# Altium PCB 1_Interface_Charge_RBF.PcbDoc
Units mm, origin at the board's own origin, x right, y up, seen from the top; angles counter-clockwise.
Board outline 82.5 x 28 mm, 2 copper layers (Top Layer, Bottom Layer), stack 1.57 mm thick; 17 components, 12 nets, 72 pads, 8 vias.
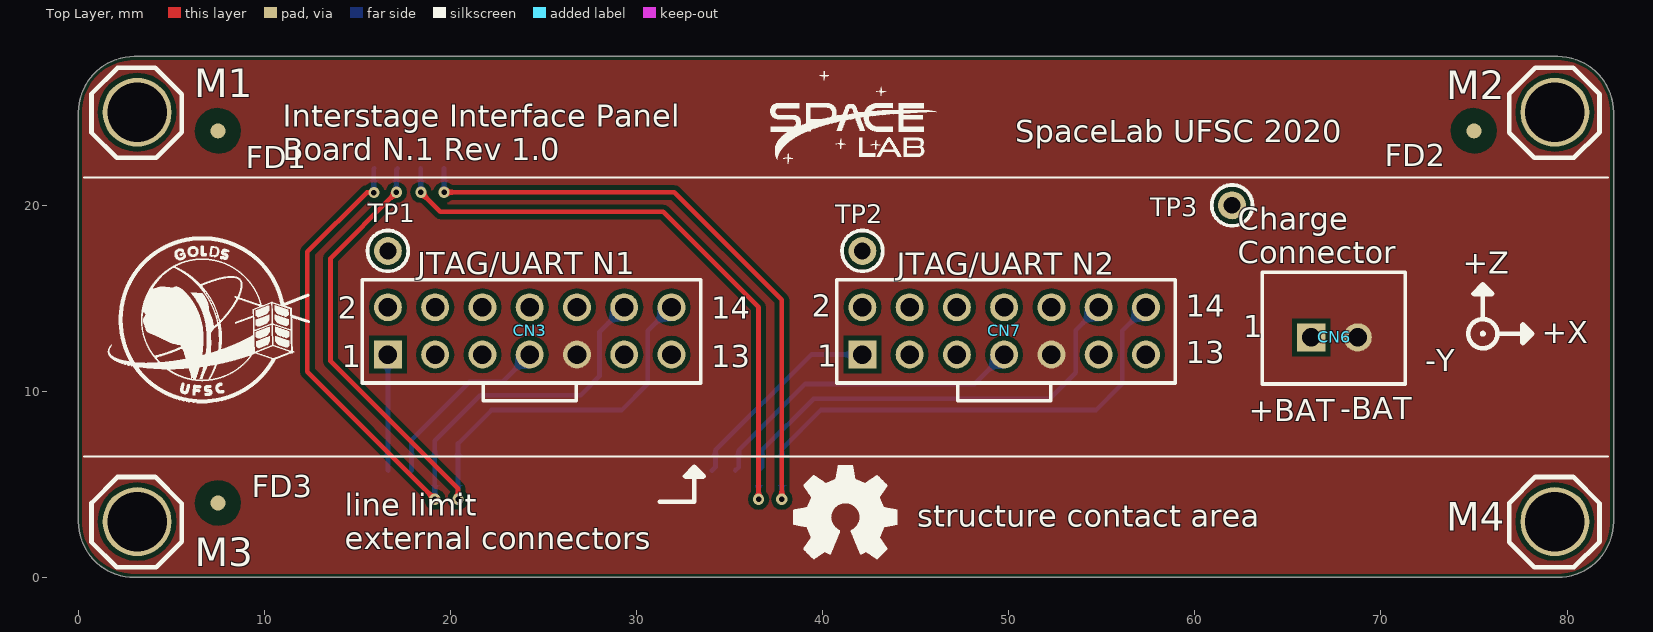
[diagram p0: Top Layer view]
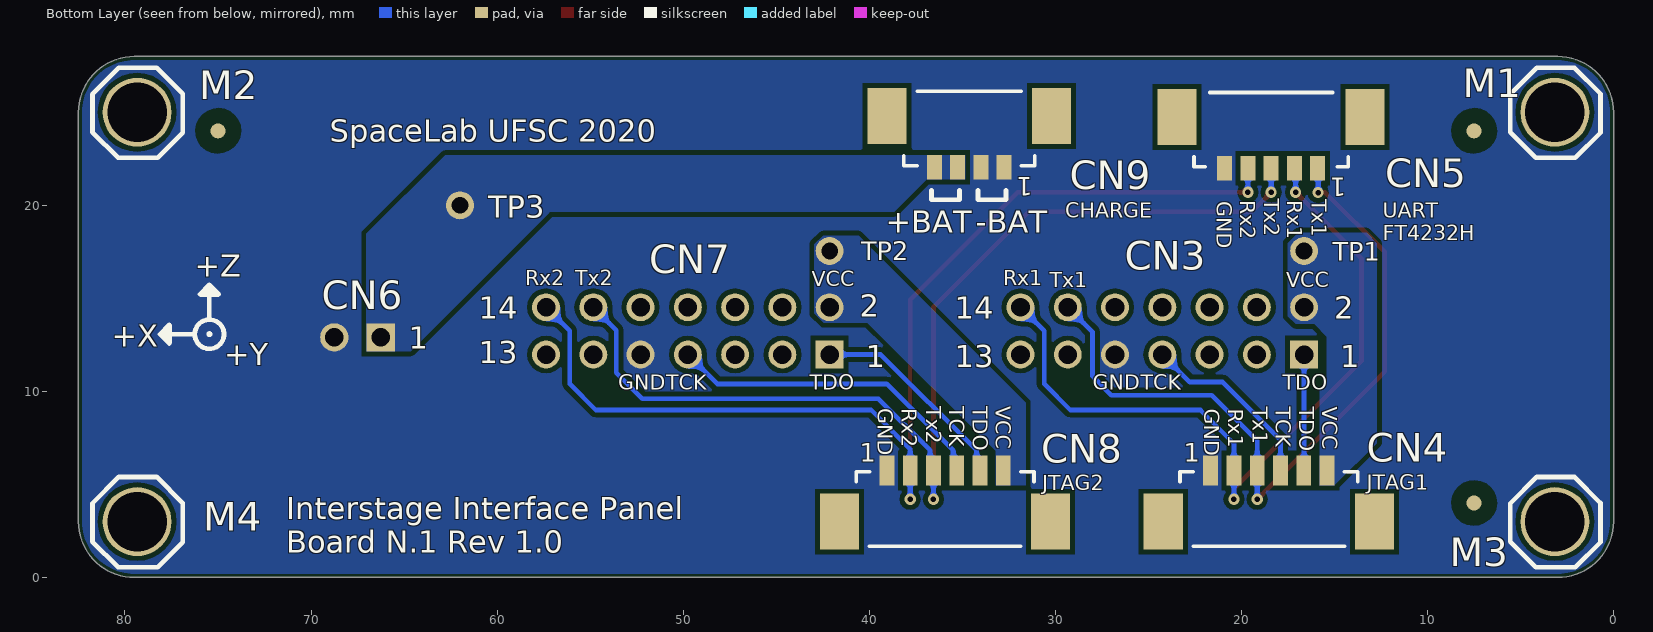
[diagram p1: Bottom Layer view, seen from below]
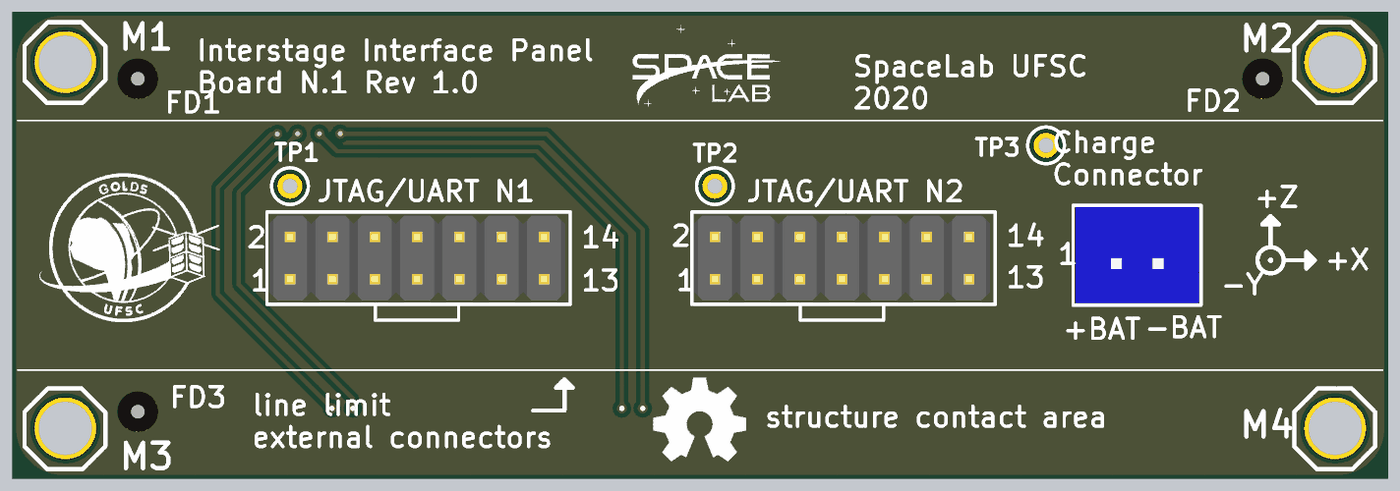
[diagram p2: 3D render of the assembled board from above, using the file's embedded part models]
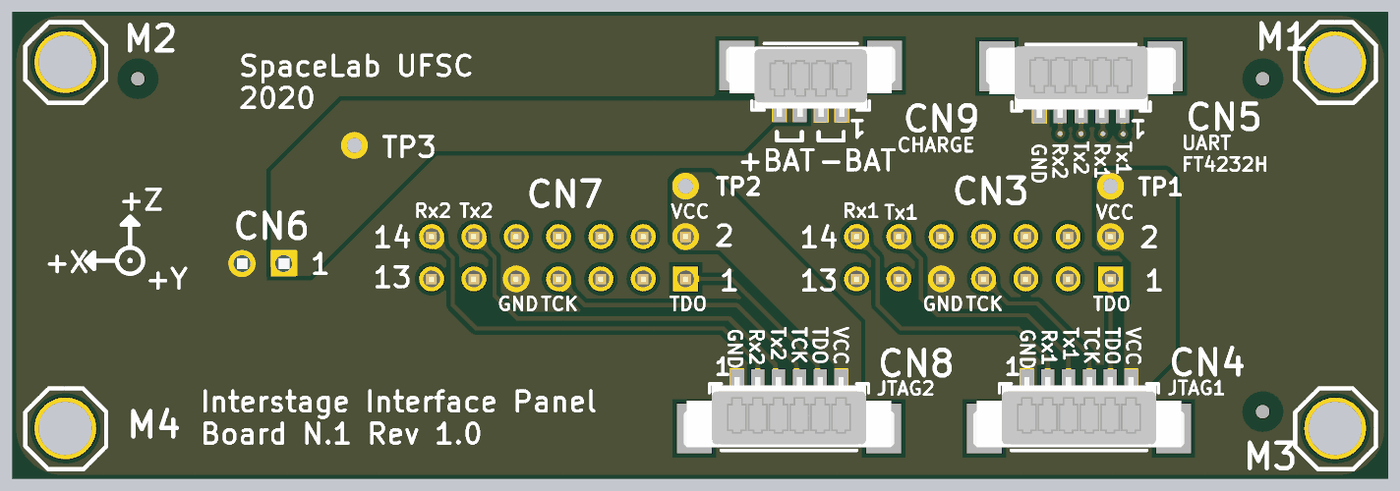
[diagram p3: 3D render of the assembled board from below, using the file's embedded part models]

## Layer stack, top to bottom
Top Solder: solder mask 0.0102, Solder Resist, Dk 3.5
Top Layer: signal copper 0.035
Dielectric 1: dielectric 1.5, FR-4, Dk 4.2
Bottom Layer: signal copper 0.035
Bottom Solder: solder mask 0.0102, Solder Resist, Dk 3.5

## Board outline
79.5,0 ccw(c79.5,3) 82.5,3 82.5,25 ccw(c79.5,25) 79.5,28 3,28 ccw(c3,25) 0,25 0,3 ccw(c3,3) 3,0

## Design rules (kind name [scope] priority, off if disabled: settings)
BoardOutlineClearance BoardOutlineClearance_JLCPCB [All] p1: gap=0.2 ignorepadtopadclearanceinfootprint=FALSE
BoardOutlineClearance [All] p2: gap=0.254 ignorepadtopadclearanceinfootprint=FALSE except(0: Arc-SplitContinuation Track-SplitContinuation SMDPad-SplitContinuation THPad-SplitContinuation Via-SplitContinuation Fill-SplitContinuation Poly-SplitContinuation Region-SplitContinuation Text-SplitContinuation)
Clearance Clearance_JLCPCB_capabilities [All] p1: gap=0.254 ignorepadtopadclearanceinfootprint=FALSE except(0: SMDPad-Hole THPad-Hole Via-Hole Fill-Hole Poly-Hole Region-Hole Text-Hole; 0.15: SMDPad-Text THPad-Text; 0.152: SMDPad-SMDPad SMDPad-THPad THPad-THPad; 0.2: Via-Via; 0.25: Arc-THPad Arc-Hole Track-THPad Track-Hole; 0.54: Arc-SMDPad Track-SMDPad) // Minimal clearances considering JLCPCB manufacturing
Clearance [All] p2: gap=0.254 ignorepadtopadclearanceinfootprint=FALSE except(0: Arc-Hole Track-Hole SMDPad-Hole THPad-Hole Via-Hole Fill-Hole Poly-Hole Region-Hole Text-Hole) // Default altium designer clearence rule
HoleSize HoleSize_JLCPCB_capabilities [All] p1: absolutevalues=TRUE maxlimit=6.3 minlimit=0.3 maxpercent=80.000 minpercent=20.000
HoleSize [All] p2: absolutevalues=TRUE maxlimit=2.54 minlimit=0.025 maxpercent=80.000 minpercent=20.000
HoleToHoleClearance HoleToHoleClearance_JLCPCB [All] p1: gap=0.5 allowstackedmicrovias=TRUE
HoleToHoleClearance [All] p2: gap=0.254 allowstackedmicrovias=TRUE
MinimumAnnularRing AnnularRing_JLCPCB_capabilities [All] p1: minimumring=0.13
MinimumAnnularRing [All] p2: minimumring=0.254
MinimumSolderMaskSliver MinimumSolderMaskSliver_JLCPCB [All] p1: minsoldermaskwidth=0.2
MinimumSolderMaskSliver [All] p2: minsoldermaskwidth=0.254
PolygonConnect PolygonConnect_GND [InNet('GND')] p1: connectstyle=Direct reliefconductorwidth=0.254 reliefentries=4 polygonreliefangle="90 Angle" airgapwidth=0.254
PolygonConnect PolygonConnect_Power [(InNet('JTAG1_VCC') OR InNet('JTAG2_VCC') OR InNet('V_Charging_Batteries'))] p2: connectstyle=Direct reliefconductorwidth=0.254 reliefentries=4 polygonreliefangle="90 Angle" airgapwidth=0.254 // Power polygons for power nets (debugger and battery charger)
PolygonConnect [All] p3: connectstyle=Relief reliefconductorwidth=0.254 reliefentries=4 polygonreliefangle="90 Angle" airgapwidth=0.254
RoutingVias RoutingVias_JLCPCB_capabilities [All] p1: holewidth=0.3 width=0.6 viastyle="Through Hole" minholewidth=0.3 minwidth=0.6 maxholewidth=0.711 maxwidth=1.27
RoutingVias [All] p2: holewidth=0.711 width=1.27 viastyle="Through Hole" minholewidth=0.711 minwidth=1.27 maxholewidth=0.711 maxwidth=1.27
SilkToSolderMaskClearance SilkToSolderMaskClearance_JLCPCB [IsPad] p1: minsilkscreentomaskgap=0.15 clearancetoexposedcopper=TRUE
SilkToSolderMaskClearance [IsPad] p2: minsilkscreentomaskgap=0.254 clearancetoexposedcopper=TRUE
SolderMaskExpansion SolderMaskExpansion_JLCPCB [All] p1: expansion=0.05
SolderMaskExpansion [All] p2: expansion=0.102
Width Width_JLCPCB_capabilities [All] p1: maxlimit=0.508 minlimit=0.127 preferedwidth=0.254 minimp=50.000000 maximp=50.000000 favimp=50.000000 // Width considering JLCPCB manufacturing
Width [All] p2: maxlimit=0.254 minlimit=0.254 preferedwidth=0.254
26 further rules are at their usual default settings.

## Classes and differential pairs
component class 1_Interface_Charge_RBF: CN3 CN4 CN5 CN6 CN7 CN8 CN9 TP1 TP2 TP3
component class 0_Architecture: FD1 FD2 FD3 M1 M2 M3 M4

## Components (designator, comment, footprint, x,y, rotation, side; value= is the part's Value field where it differs from the comment)
CN3 "7 POS dual line Pin Header 2.54mm" "CONN HEADER VERT 14POS 2.54MM" 24.25,13.25 r0 top
CN4 "6 pin Picoblade" "PICO BLADE 0533980671" 18.525,4.375 r180 bottom
CN5 "5 pin PicoBlade" "PICO BLADE 0533980571" 18.4,23.367 r0 bottom
CN6 "JST 2 position header 2.5mm" B2B-XH-A-M(LF)(SN) 67.5,12.9 r0 top
CN7 "7 POS dual line Pin Header 2.54mm" "CONN HEADER VERT 14POS 2.54MM" 49.75,13.25 r0 top
CN8 "6 pin Picoblade" "PICO BLADE 0533980671" 35.925,4.375 r180 bottom
CN9 "4 pin Picoblade" "PICO BLADE 0533980471" 34.625,23.425 r0 bottom value=0533980471
FD1 "Fiducial" "FIDUCIAL 1.3MM" 7.5,24 r0 top
FD2 "Fiducial" "FIDUCIAL 1.3MM" 75,24 r0 top
FD3 "Fiducial" "FIDUCIAL 1.3MM" 7.5,4 r0 top
M1 "IB Mechanical Hole" "IB Mechanical Hole"#1 3.15,25.425 r0 top
M2 "IB Mechanical Hole" "IB Mechanical Hole"#2 79.35,24.9 r0 top
M3 "IB Mechanical Hole" "IB Mechanical Hole"#3 3.15,3.5 r0 top
M4 "IB Mechanical Hole" "IB Mechanical Hole"#3 79.35,3.5 r0 top
TP1 "DNP" "TEST POINT PTH" 16.63,17.55 r0 top
TP2 "DNP" "TEST POINT PTH" 42.13,17.55 r0 top
TP3 "DNP" "TEST POINT PTH" 62,20 r0 top

## Footprints (in the part's own frame and the unit in brackets; to place one, negate y for a bottom-side part, rotate by r counter-clockwise, add the part's x,y. Pads: shape width x height; smd on the part's side, far side on the other; paste and mask are expansions set on the pad)
B2B-XH-A-M(LF)(SN) [mm]
  rect 1.524x1.524 hole 1: 1(-1.25,0)
  round 1.524 hole 1: 2(1.25,0)
  silkscreen extent -3.88,-2.5 3.8,3.5, body extent -3.72,-2.37 3.68,3.38, height 7.01
"CONN HEADER VERT 14POS 2.54MM" [mm]
  rect 1.5x1.5 hole 1: 1(-7.62,-1.27)
  round 1.5 hole 1: 2(-7.62,1.27) 3(-5.08,-1.27) 4(-5.08,1.27) 5(-2.54,-1.27) 6(-2.54,1.27) 7(0,-1.27) 8(0,1.27) 9(2.54,-1.27) 10(2.54,1.27) 11(5.08,-1.27) 12(5.08,1.27) 13(7.62,-1.27) 14(7.62,1.27)
  silkscreen extent -9,-2.8 9.2,2.75, body extent -8.88,-2.55 8.9,2.53, height 8.65
"FIDUCIAL 1.3MM" [mil]
  round 32 smd far side: ""(0,0)
  round 32 smd: ""(0,0)
  Top Layer pour cut-out: -48.23,-6.89 -45.31,17.58 -30.69,37.43 -8.18,47.47 16.35,45.09 36.52,30.91 47.05,8.63 45.22,-15.95 31.5,-36.42 31.5,-36.42 8.41,-46.85 -16.81,-44.45 -37.51,-29.85 -48.23,-6.89
  Top Layer pour cut-out: 0.19,48.23
  Bottom Layer pour cut-out: -48.23,-6.89 -45.31,17.58 -30.69,37.43 -8.18,47.47 16.35,45.09 36.52,30.91 47.05,8.63 45.22,-15.95 31.5,-36.42 31.5,-36.42 8.41,-46.85 -16.81,-44.45 -37.51,-29.85 -48.23,-6.89
"IB Mechanical Hole"#1 [mm]
  round 3.7 hole 3.2: 0(0,-0.425)
"IB Mechanical Hole"#2 [mm]
  round 3.7 hole 3.2: 0(0,0.1)
"IB Mechanical Hole"#3 [mm]
  round 3.7 hole 3.2: 0(0,-0.5)
"PICO BLADE 0533980471" [mm]
  rect 2.1x3 smd: 0(-4.425,-1.375) 0(4.425,-1.375)
  rect 0.8x1.3 smd: 1(-1.875,1.375) 2(-0.625,1.375) 3(0.625,1.375) 4(1.875,1.375)
  silkscreen extent -3.52,-2.7 3.52,1.3, body extent -5.07,-2.5 5.07,1.7, height 5.88
"PICO BLADE 0533980571" [mm]
  rect 2.1x3 smd: 0(-5.05,-1.375) 0(5.05,-1.375)
  rect 0.8x1.3 smd: 1(-2.5,1.375) 2(-1.25,1.375) 3(0,1.375) 4(1.25,1.375) 5(2.5,1.375)
  silkscreen extent -4.15,-2.7 4.15,1.3, body extent -5.7,-2.6 5.7,1.7, height 5.87
"PICO BLADE 0533980671" [mm] "CONN HEADER SMD 6POS 1.25MM"
  rect 2.1x3 smd: 0(-5.675,-1.375) 0(5.675,-1.375)
  rect 0.8x1.6 smd: 1(-3.125,1.375) 2(-1.875,1.375) 3(-0.625,1.375) 4(0.625,1.375) 5(1.875,1.375) 6(3.125,1.375)
  silkscreen extent -4.77,-2.7 4.77,1.3, body extent -6.32,-2.5 6.32,1.7, height 5.87
"TEST POINT PTH" [mm]
  round 1.5 hole 0.9: 1(0,0)
  silkscreen extent -1.1,-1.1 1.1,1.1

## Part data
CN3 CN7: library part M20-9980745, "Headers & Wire Housings 07+07 DIL VERTICAL PIN HEADER GOLD HT", Color=Black, Contact Resistance=25mR, Manufacturer=Harwin, Max Current Rating=3A, Max Operating Temperature=105°C, Min Operating Temperature=-40°C, Package Quantity=500, Supplier Part Number 1=952-1932-ND, ComponentLink1Description=https://www.verical.com/server-webapp/html/getDatasheet?partID=468550&src-supplier=Verical, ComponentLink1URL=https://www.verical.com/server-webapp/html/getDatasheet?partID=468550&src-supplier=Verical, ComponentLink2Description=http://www.harwin.com/include/downloads/drawings/M20-998.PDF?src-supplier=Element14, ComponentLink2URL=http://www.harwin.com/include/downloads/drawings/M20-998.PDF?src-supplier=Element14, ComponentLink3Description=http://www.mouser.com/ds/2/181/M20-998-351176.pdf?src-supplier=Mouser, ComponentLink3URL=http://www.mouser.com/ds/2/181/M20-998-351176.pdf?src-supplier=Mouser, Connector Type="Male Pin", Contact Material=Brass, Contact Mating Length=0.24inch, Contact Plating=Gold, Depth=5.08mm, Gender=Male, Housing Color=Black, Housing Material=Nylon, Length=17.78mm, Manufacturer Part Number=M20-9980745, Mount="Through Hole", Number of Contacts=14, Number of Positions=14, Number of Rows=2, Orientation=Straight, Packaging=Bag, Pitch=2.54mm, Pricing 1="1=0.54, 10=0.51, 100=0.391, 500=0.34, 1000=0.2805, 5000=0.2465, 10000=0.2295 (USD)", Pricing 2="1=0.54, 10=0.51, 100=0.387, 500=0.34, 1000=0.28, 2500=0.246 (USD)", Radiation Hardening=No, REACH SVHC="No SVHC", Row Spacing=0.1inch, Stock 1=15564, Stock 2=1790, Supplier 1=Digi-Key, Supplier 2=Mouser, Supplier Part Number 2=855-M20-9980745, Termination=Solder
CN4 CN8: library part 53398-0671, "1.25mm Pitch PicoBlade™ Header, Surface Mount, Vertical, 6 Circuits", Color=Natural, Contact Resistance=20mR, Current Rating=1A, Flammability Rating="UL94 V-0", Insulation Resistance=100MR, Manufacturer=Molex, Max Operating Temperature=85°C, Min Operating Temperature=-40°C, Package Quantity=1000, Supplier Part Number 1=WM7610DKR-ND, Voltage Rating=125V, Body Plating=Tin, ComponentLink1Description=https://www.molex.com/pdm_docs/sd/533980671_sd.pdf?src-supplier=Digi-Key, ComponentLink1URL=https://www.molex.com/pdm_docs/sd/533980671_sd.pdf?src-supplier=Digi-Key, Contact Material=Bronze,Tin, Contact Plating=Tin, Gender=Male, Glow Wire Compliant=Non-compliant, Housing Color=Natural, Housing Material=Nylon, Lead Free="Lead Free", Lead Pitch=1.25mm, Manufacturer Part Number=53398-0671, Mount="Surface Mount", Number of Circuits=6, Number of Contacts=6, Number of Positions=6, Number of Rows=1, Orientation=Vertical, Packaging="Tape and Reel", Pitch=1.25mm, Pricing 1="1=1.39, 10=1.26, 100=1.0802, 500=0.90014 (USD)", Pricing 2="1=1.15, 10=1.01, 100=0.864, 500=0.727, 1000=0.427, 2000=0.374 (USD)", Radiation Hardening=No, REACH SVHC=Unknown, Stock 1=21086, Stock 2=26, Supplier 1=Digi-Key, Supplier 2=Mouser, Supplier Part Number 2=538-53398-0671, Termination=Solder, Voltage Rating (AC)=125V, Voltage Rating (DC)=125V, Working Voltage=125V
CN5: library part 53398-0571, "Wire-To-Board Connector, Vertical, PicoBlade 53398 Series, Surface Mount, Header, 5, 1.25 mm", Color=Natural, Contact Resistance=20mR, Current Rating=1A, Flammability Rating="UL94 V-0", Insulation Resistance=100MR, Manufacturer=Molex, Max Operating Temperature=85°C, Max Voltage Rating (AC)=125V, Min Operating Temperature=-40°C, Package Quantity=1000, Supplier Part Number 1=WM7609CT-ND, Body Plating=Tin, ComponentLink1Description=http://www.molex.com/webdocs/datasheets/pdf/en-us/0533980571_PCB_HEADERS.pdf?src-supplier=Avnet+Europe, ComponentLink1URL=http://www.molex.com/webdocs/datasheets/pdf/en-us/0533980571_PCB_HEADERS.pdf?src-supplier=Avnet+Europe, ComponentLink2Description=http://www.farnell.com/datasheets/2697810.pdf?src-supplier=Newark, ComponentLink2URL=http://www.farnell.com/datasheets/2697810.pdf?src-supplier=Newark, ComponentLink3Description=https://www.distrelec.biz/Web/Downloads/46/_e/gf116833-116846_e.pdf?mime=application%2Fpdf&src-supplier=Distrelec, ComponentLink3URL=https://www.distrelec.biz/Web/Downloads/46/_e/gf116833-116846_e.pdf?mime=application%2Fpdf&src-supplier=Distrelec, ComponentLink4Description=http://www.farnell.com/datasheets/1632115.pdf?src-supplier=Element14, ComponentLink4URL=http://www.farnell.com/datasheets/1632115.pdf?src-supplier=Element14, ComponentLink5Description=http://uk.rs-online.com/webdocs/078f/0900766b8078fc92.pdf?src-supplier=RSComponents, ComponentLink5URL=http://uk.rs-online.com/webdocs/078f/0900766b8078fc92.pdf?src-supplier=RSComponents, ComponentLink6Description=http://www.farnell.com/datasheets/1867377.pdf?src-supplier=Element14, ComponentLink6URL=http://www.farnell.com/datasheets/1867377.pdf?src-supplier=Element14, ComponentLink7Description=http://www.farnell.com/datasheets/1626108.pdf?src-supplier=Element14, ComponentLink7URL=http://www.farnell.com/datasheets/1626108.pdf?src-supplier=Element14, ComponentLink8Description=http://www.mouser.com/ds/2/276/0533980571_PCB_HEADERS-146486.pdf?src-supplier=Mouser, ComponentLink8URL=http://www.mouser.com/ds/2/276/0533980571_PCB_HEADERS-146486.pdf?src-supplier=Mouser, Contact Gender=Male, Contact Material=Bronze,Tin,Brass, Contact Plating=Tin, Gender=Male, Glow Wire Compliant=Non-compliant, Housing Color=Natural, Housing Material=Nylon, Lead Free="Lead Free", Lead Pitch=1.25mm, Manufacturer Part Number=53398-0571, Mount="Surface Mount", Number of Circuits=5, Number of Contacts=5, Number of Positions=5, Number of Rows=1, Orientation=Vertical, Packaging="Tape and Reel", Pitch=1.25mm, Pricing 1="1=1.32, 10=1.159, 100=0.9999, 500=0.81814 (USD)", Pricing 2="1=1.32, 10=1.15, 100=0.999, 500=0.818, 1000=0.389, 2000=0.342 (USD)", Radiation Hardening=No, REACH SVHC=Unknown, Stock 1=427, Stock 2=35606, Supplier 1=Digi-Key, Supplier 2=Mouser, Supplier Part Number 2=538-53398-0571, Termination=Solder, Voltage Rating=125V, Voltage Rating (AC)=125V, Voltage Rating (DC)=125V, Working Voltage=125V
CN6: library part B2B-XH-A-M(LF)(SN), "CONN HEADER TOP 2POS 2.5MM GRN", Color=Natural, Manufacturer=JST, Package Quantity=1000, Supplier Part Number 1=455-2879-ND, ComponentLink1Description=http://www.jst-mfg.com/product/pdf/eng/eXH.pdf, ComponentLink1URL=http://www.jst-mfg.com/product/pdf/eng/eXH.pdf, Connector Type="Male Pin", Contact Plating=Tin, Fastening Type=Detent, Manufacturer Part Number=B2B-XH-A-M(LF)(SN), Mount="Through Hole", Number of Positions=2, Number of Rows=1, Packaging=Bulk, Pitch=0.098inch, Pricing 1="1=0.17, 10=0.157, 100=0.0966, 500=0.07998, 1000=0.06999, 5000=0.05999, 10000=0.05832 (USD)", Stock 1=5564, Supplier 1=Digi-Key, Termination=Press-Fit
CN9: library part 0533980471, "Connector Header Surface Mount 4 position 0.049\" (1.25mm)", Manufacturer=Molex, Mount Type=SMD, N of Positions=4, Pitch=1.25mm
FD1 FD2 FD3: "Fiducial for DB board variants"
M1 M2 M3 M4: "Mechanical Hole for FloripaSat-2 interface boards"
TP1 TP2 TP3: library part "Test Point PTH", "TEST POINT PAD"

## Via types
v1: diameter 0.6, hole 0.3, Top Layer to Bottom Layer, tented both sides, 8 vias

## Nets (pads, with @x,y where several pads share a name; then routed paths per layer and width w, separated by ;. In a path a pad name is that pad's centre, name@x,y a point inside that pad or via, vN(x,y) a via of type N, cw(c..) or ccw(c..) an arc to the next point about the centre after c; other vN are vias at no path point)
GND: CN3.9 CN4.1 CN5.5 CN6.2 CN7.9 CN8.1 CN9.1 CN9.2
JTAG1_TCK: CN3.7 CN4.4 | length 9.9
  Bottom Layer w0.254: CN4.4 17.9,7.4 21,10.5 22.77,10.5 CN3.7
JTAG1_TDO_TDI: CN3.1 CN4.5 | length 6.2
  Bottom Layer w0.254: CN3.1 16.63,5.77 CN4.5
JTAG1_VCC: CN3.2 CN4.6 TP1.1
JTAG2_TCK: CN7.7 CN8.4 | length 17.6
  Bottom Layer w0.254: CN8.4 35.483,5.933 35.483,6.826 39.057,10.4 48.17,10.4 CN7.7
JTAG2_TDO_TDI: CN7.1 CN8.5 | length 11.2
  Bottom Layer w0.254: CN8.5 34.233,5.933 34.233,6.826 39.387,11.98 CN7.1
JTAG2_VCC: CN7.2 CN8.6 TP2.1
UART_Rx1: CN3.14 CN4.2 CN5.2 | length 41.3
  Top Layer w0.254: v1(17.087,20.7) 13.55,17.163 13.55,11.625 20.4,4.775 v1(20.4,4.2)
  Bottom Layer w0.254: v1(17.087,20.7) 17.087,21.93 CN5.2 ; v1(20.4,4.2) CN4.2 20.4,7.2 22.2,9 29.2,9 30.6,10.4 30.6,13.25 CN3.14
UART_Rx2: CN5.4 CN7.14 CN8.2 | length 59.7
  Top Layer w0.254: v1(19.65,20.7) 32.025,20.7 37.8,14.925 v1(37.8,4.2)
  Bottom Layer w0.254: v1(19.65,20.7) CN5.4 ; v1(37.8,4.2) CN8.2 37.8,6.9 39.9,9 54.7,9 56.1,10.4 56.1,13.25 CN7.14
UART_Tx1: CN3.12 CN4.3 CN5.1 | length 40
  Top Layer w0.254: v1(15.875,20.684) 15.491,20.684 12.3,17.493 12.3,11.05 v1(19.15,4.2)
  Bottom Layer w0.254: v1(15.875,20.684) 15.875,21.967 CN5.1 ; v1(19.15,4.2) CN4.3 19.15,7.35 21.6,9.8 26.99,9.8 28,10.81 28,13.19 CN3.12
UART_Tx2: CN5.3 CN7.12 CN8.3 | length 57.7
  Top Layer w0.254: v1(18.4,20.7) 19.45,19.65 31.425,19.65 36.55,14.525 v1(36.55,4.2)
  Bottom Layer w0.254: v1(18.4,20.7) CN5.3 ; v1(36.55,4.2) CN8.3 36.733,5.933 36.733,6.826 39.507,9.6 52.2,9.6 53.6,11 53.6,13.29 CN7.12
V_Charging_Batteries: CN6.1 CN9.3 CN9.4 TP3.1
pads on no net: CN3.3 CN3.4 CN3.5 CN3.6 CN3.8 CN3.10 CN3.11 CN3.13 CN4.0 CN5.0 CN7.3 CN7.4 CN7.5 CN7.6 CN7.8 CN7.10 CN7.11 CN7.13 CN8.0 CN9.0 FD1. FD2. FD3. M1.0 M2.0 M3.0 M4.0

## Polygon pours and split planes (outlines as drawn)
GND on Bottom Layer "Top Layer-GND" (solid, remove dead copper, pour order 16): 0,25 cw(c3,25) 3,28 79.452,28 cw(c79.452,24.952) 82.5,24.952 82.5,3.048 cw(c79.452,3.048) 79.452,0 3.048,0 cw(c3.048,3.048) 0,3.048
JTAG1_VCC on Bottom Layer "Bottom Layer-JTAG1_VCC" (solid, pour order 14): 12.725,17.975 13.275,18.525 16.95,18.525 17.5,17.975 17.5,14.05 17.075,13.625 16.075,13.625 15.4,12.95 15.4,10.525 15.8,10.125 15.8,4.95 15,4.95 12.725,7.225
JTAG2_VCC on Bottom Layer "Bottom Layer-JTAG2_VCC" (solid, pour order 12): 42.475,18.375 42.95,17.9 42.95,14.2 42.45,13.7 40.1,13.7 33.2,6.8 33.2,4.95 31.6,4.95 31.6,9.4 40.575,18.375
V_Charging_Batteries on Bottom Layer "Bottom Layer-V_Charging_Batteries" (solid, pour order 10): 64.65,12.15 57.187,19.613 57.187,19.65 38.658,19.65 36.908,21.4 34.85,21.4 34.85,22.7 62.8,22.7 67.025,18.475 67.025,12.15
no net on Bottom Layer "Bottom Layer-No Net" (solid, pour order 8): 15.33,20.125
GND on Top Layer "Top Layer-GND" (solid, remove dead copper, pour order 2): 0,25 cw(c3,25) 3,28 79.452,28 cw(c79.452,24.952) 82.5,24.952 82.5,3.048 cw(c79.452,3.048) 79.452,0 3.048,0 cw(c3.048,3.048) 0,3.048

## Silkscreen, mask and mechanical layers (free items; w line width, h text height)
Top Overlay:
  drawing of 1070 lines, arcs and shapes, not listed
  text "SpaceLab UFSC 2020" at 50.35,23.392 h1.2
  text "Interstage Interface Panel  / Board N.1 Rev 1.0" at 10.983,22.425 h1.2
  text "Charge / Connector" at 62.3,16.9 h1.2
  text "+Z" at 74.385,16.325 h1.2
  text "JTAG/UART N1" at 18.2,16.285 h1.2
  text "JTAG/UART N2" at 43.966,16.275 h1.2
  text "2" at 39.4,14 h1.2
  text "14" at 59.5,14 h1.2
  text "2" at 13.932,13.9 h1.2
  text "14" at 34,13.9 h1.2
  text "1" at 62.6,12.9 h1.2
  text "+X" at 78.635,12.575 h1.2
  text "13" at 59.5,11.5 h1.2
  text "1" at 39.7,11.325 h1.2
  text "1" at 14.158,11.3 h1.2
  text "13" at 34,11.3 h1.2
  text "-Y" at 72.385,11.075 h1.2
  text "-BAT" at 67.8,8.5 h1.2
  text "+BAT" at 62.9,8.4 h1.2
  text "structure contact area" at 45.071,2.724 h1.2
  text "line limit  / external connectors" at 14.3,1.517 h1.2
Bottom Overlay:
  circle w0.254: c75.465,13.075 r0.785
  circle w0.254: c75.465,13.075 r0.035
  region: 74.965,15.1 75.465,15.6 75.965,15.1
  region: 77.49,13.575 77.99,13.075 77.49,12.575
  lines w0.254: 32.65,20.8 32.65,20.3 34.15,20.3 34.15,20.8 ; 35.15,20.8 35.15,20.3 36.65,20.3 36.65,20.8 ; 74.965,15.225 75.465,15.725 ; 75.465,13.86 75.465,15.725 ; 75.965,15.225 75.465,15.725 ; 76.25,13.075 78.115,13.075 ; 77.615,12.575 78.115,13.075 ; 77.615,13.575 78.115,13.075 ; 0.7,1.9 2.05,0.55 3.1,0.55 4.175,0.55 5.55,1.925 5.55,2.95 5.55,3.975 4.125,5.4 3.15,5.4 2.1,5.4 0.7,4 0.7,3 0.7,1.9 ; 0.7,23.9 0.7,25 0.7,26 2.1,27.4 3.15,27.4 4.125,27.4 5.55,25.975 5.55,24.95 5.55,23.925 4.175,22.55 3.1,22.55 2.05,22.55 0.7,23.9 ; 76.9,1.9 78.25,0.55 79.3,0.55 80.375,0.55 81.75,1.925 81.75,2.95 81.75,3.975 80.325,5.4 79.35,5.4 78.3,5.4 76.9,4 76.9,3 76.9,1.9 ; 76.9,23.9 76.9,25 76.9,26 78.3,27.4 79.35,27.4 80.325,27.4 81.75,25.975 81.75,24.95 81.75,23.925 80.375,22.55 79.3,22.55 78.25,22.55 76.9,23.9
  text "M1" at 8.1,25.8 h1.52
  text "M2" at 76,25.7 h1.52
  text "SpaceLab UFSC 2020" at 69,23.412 h1.2
  text "Tx2" at 18.775,20.35 h0.8 r90
  text "Tx1" at 16.225,20.325 h0.8 r90
  text "Rx1" at 17.525,20.275 h0.8 r90
  text "Rx2" at 20.05,20.275 h0.8 r90
  text "GND" at 21.325,20.225 h0.8 r90
  text "CHARGE" at 29.475,19.325 h0.8
  text "TP3" at 60.475,19.325 h1.2
  text "-BAT" at 34.275,18.525 h1.2
  text "+BAT" at 39.125,18.525 h1.2
  text "UART  / FT4232H" at 12.4,18.125 h0.8
  text "TP2" at 40.425,17.05 h1
  text "TP1" at 15.1,17.025 h1
  text "+Z" at 76.25,16.157 h1.2
  text "Rx1" at 32.8,15.7 h0.8
  text "Tx2" at 55.8,15.7 h0.8
  text "Rx2" at 58.5,15.7 h0.8
  text "VCC" at 43.1,15.65 h0.8
  text "VCC" at 17.6,15.6 h0.8
  text "Tx1" at 30.3,15.6 h0.8
  text "2" at 40.5,14 h1.2
  text "2" at 15,13.9 h1.2
  text "14" at 35.4,13.9 h1.2
  text "14" at 61,13.9 h1.2
  text "+X" at 80.715,12.407 h1.2
  text "1" at 64.75,12.3 h1.2
  text "13" at 61,11.5 h1.2
  text "+Y" at 74.665,11.407 h1.2
  text "1" at 14.7,11.3 h1.2
  text "13" at 35.4,11.3 h1.2
  text "1" at 40.2,11.3 h1.2
  text "TDO" at 17.775,10.1 h0.8
  text "TCK" at 25.4,10.1 h0.8
  text "GND" at 28,10.1 h0.8
  text "TDO" at 43.2,10.1 h0.8
  text "TCK" at 50.9,10.1 h0.8
  text "GND" at 53.5,10.1 h0.8
  text "VCC" at 33.2,9.2 h0.8 r90
  text "TDO" at 34.45,9.2 h0.8 r90
  text "TCK" at 35.7,9.2 h0.8 r90
  text "Tx2" at 36.95,9.2 h0.8 r90
  text "VCC" at 15.65,9.17 h0.8 r90
  text "TDO" at 16.9,9.17 h0.8 r90
  text "TCK" at 18.15,9.17 h0.8 r90
  text "Tx1" at 19.4,9.17 h0.8 r90
  text "Rx2" at 38.25,9.1 h0.8 r90
  text "GND" at 39.55,9.1 h0.8 r90
  text "Rx1" at 20.7,9.07 h0.8 r90
  text "GND" at 22,9.07 h0.8 r90
  text "JTAG1" at 13.25,4.725 h0.8
  text "JTAG2" at 30.7,4.7 h0.8
  text "M4" at 75.8,2.5 h1.52
  text "Interstage Interface Panel  / Board N.1 Rev 1.0" at 71.325,1.325 h1.2
  text "M3" at 8.8,0.6 h1.52
Board Edge:
  lines w0.2: 0,2.962 ccw(c2.962,2.962) 2.962,0 79.515,0 ccw(c79.515,2.985) 82.5,2.985 82.5,24.998 ccw(c79.498,24.998) 79.498,28 3.225,28 2.995,28 ccw(c2.995,25.005) 0,25.005 0,23.5 0,6.5 0,2.962
Dimensions:
  circle w0.2: c79.35,3 r1.6
  circle w0.2: c79.35,25 r1.6
  circle w0.2: c3.15,25 r1.6
  circle w0.2: c3.15,3 r1.6
  region: 34.45,5.337 34.95,5.837 35.45,5.337
  lines w0.2: 0.3,6.5 82.2,6.5 ; 0.3,21.5 82.2,21.5
  lines w0.254: 33.085,4.097 34.95,4.097 34.95,5.962 ; 34.45,5.462 34.95,5.962 ; 35.45,5.462 34.95,5.962
  text "Mechanical specs board N.1" at 19.575,30.725 h1.5
  text "structure contact area" at 26.375,23.55 h1.2
  text "external conectors area" at 25.475,13.225 h1.2
  text "(cm)" at 17.8,3.8 h1
  text "structure contact area" at 45.071,2.724 h1.2
  text "line limit  / external connectors" at 16.15,1.525 h1.2
BOTTOM ASM:
  text "CN9" at 36.175,21.6 h1.2
  text "CN5" at 20.1,21.4 h1.2
  text "CN4" at 20.1,4.9 h1.2
  text "CN8" at 37.5,4.9 h1.2
TOP ASM:
  text "CN6" at 65.8,14.4 h1.2
  text "CN3" at 22.6,14 h1.2
  text "CN7" at 48.1,14 h1.2
Sheet:
  drawing of 204 lines, arcs and shapes, not listed
  text "Layer" at -0.224,51.1 h1.2
  text "Name" at 7.974,51.1 h1.2
  text "Material" at 26.569,51.1 h1.2
  text "Thickness" at 43.764,51.1 h1.2
  text "Constant" at 56.761,51.1 h1.2
  text "Board Layer Stack" at 68.158,51.1 h1.2
  text "1" at -0.224,48.7 h1.2
  text "Top Overlay" at 7.974,48.7 h1.2
  text "2" at -0.224,46.3 h1.2
  text "Top Solder" at 7.974,46.3 h1.2
  text "Solder Resist" at 26.569,46.3 h1.2
  text "0,010mm" at 43.764,46.3 h1.2
  text "3,5" at 56.761,46.3 h1.2
  text "3" at -0.224,43.9 h1.2
  text "Top Layer" at 7.974,43.9 h1.2
  text "Copper" at 26.569,43.9 h1.2
  text "0,035mm" at 43.764,43.9 h1.2
  text "4" at -0.224,41.5 h1.2
  text "Dielectric 1" at 7.974,41.5 h1.2
  text "FR-4" at 26.569,41.5 h1.2
  text "1,500mm" at 43.764,41.5 h1.2
  text "4,2" at 56.761,41.5 h1.2
  text "5" at -0.224,39.1 h1.2
  text "Bottom Layer" at 7.974,39.1 h1.2
  text "Copper" at 26.569,39.1 h1.2
  text "0,035mm" at 43.764,39.1 h1.2
  text "6" at -0.224,36.7 h1.2
  text "Bottom Solder" at 7.974,36.7 h1.2
  text "Solder Resist" at 26.569,36.7 h1.2
  text "0,010mm" at 43.764,36.7 h1.2
  text "3,5" at 56.761,36.7 h1.2
  text "7" at -0.224,34.3 h1.2
  text "Bottom Overlay" at 7.974,34.3 h1.2
  text "DATE:" at 118,-10.675 h1.92
  text "1.0" at 109.775,-10.75 h1.92
  text "DD/MM/2020" at 128.725,-10.75 h1.92
  text "REV:" at 100.525,-10.988 h2.41
  text "TITLE: IIP SEMI USB N.1 BOARD" at 13,-11.163 h2.54
  text "Silkscreen color: white" at 53.525,-15.925 h1.92
  text "MATERIAL:" at 12.84,-16.073 h1.92
  text "FR4" at 29.667,-16.073 h1.92
  text "Project: IIP FloripaSat-2" at 100.3,-16.1 h1.92
  text "Space Technology Research Laboratory" at 99.15,-19.775 h1.4
  text "Board Tickness:" at 12.515,-20.836 h1.92
  text "Layers: 02" at 53.725,-20.85 h1.92
  text "1.6mm" at 41.2,-20.95 h1.92
  text "Federal University of Santa Catarina" at 99.625,-22.45 h1.4
  text "SpaceLab UFSC" at 99.6,-25.325 h1.4
  text "Drawing:" at 53.975,-25.375 h1.92
  text "Yan C. de Azeredo" at 69.175,-25.375 h1.73
  text "PCB Surface:" at 12.325,-25.75 h1.92
  text "ENIG" at 35.15,-25.875 h1.73
Drill Drawing:
  circle w0.2: c0.712,62.917 r0.667
  lines w0.2: 0.046,59.25 1.379,59.25 1.379,60.583 0.046,60.583 0.046,59.25 ; 0.046,66.583 1.379,66.583 0.712,65.25 0.046,66.583 ; 0.046,68.583 0.379,68.583 0.712,68.25 1.046,68.583 1.379,68.583 1.046,68.917 1.379,69.25 1.046,69.25 0.712,69.583 0.379,69.25 0.046,69.25 0.379,68.917 0.046,68.583
  lines w0.3: -1.15,58.35 141.451,58.35 ; -1.15,70.35 141.451,70.35 ; 9.868,55.35 9.868,73.35 ; 20.665,55.35 20.665,73.35 ; 44.058,55.35 44.058,73.35 ; 54.175,55.35 54.175,73.35 ; 68.851,55.35 68.851,73.35 ; 98.842,55.35 98.842,73.35 ; 110.639,55.35 110.639,73.35 ; 125.555,55.35 125.555,73.35 ; -1.15,55.35 141.451,55.35 141.451,73.35 -1.15,73.35 -1.15,55.35
  text "Symbol" at 0.65,71.25 h1.44
  text "Count" at 10.768,71.25 h1.44
  text "Hole Size" at 21.565,71.25 h1.44
  text "Plated" at 44.958,71.25 h1.44
  text "Hole Type" at 55.075,71.25 h1.44
  text "Drill Layer Pair" at 69.751,71.25 h1.44
  text "Via/Pad" at 99.742,71.25 h1.44
  text "Pad Shape" at 111.539,71.25 h1.44
  text "Template" at 126.455,71.25 h1.44
  text "8" at 10.768,68.25 h1.2
  text "0,300mm (11,81mil)" at 21.565,68.25 h1.2
  text "PTH" at 44.958,68.25 h1.2
  text "Round" at 55.075,68.25 h1.2
  text "Top Layer - Bottom Layer" at 69.751,68.25 h1.2
  text "Via" at 99.742,68.25 h1.2
  text "Rounded" at 111.539,68.25 h1.2
  text "v60h30m0mx0" at 126.455,68.25 h1.2
  text "3" at 10.768,65.25 h1.2
  text "0,900mm (35,43mil)" at 21.565,65.25 h1.2
  text "PTH" at 44.958,65.25 h1.2
  text "Round" at 55.075,65.25 h1.2
  text "Top Layer - Bottom Layer" at 69.751,65.25 h1.2
  text "Pad" at 99.742,65.25 h1.2
  text "Rounded" at 111.539,65.25 h1.2
  text "c150h90" at 126.455,65.25 h1.2
  text "30" at 10.768,62.25 h1.2
  text "1,000mm (39,37mil)" at 21.565,62.25 h1.2
  text "PTH" at 44.958,62.25 h1.2
  text "Round" at 55.075,62.25 h1.2
  text "Top Layer - Bottom Layer" at 69.751,62.25 h1.2
  text "Pad" at 99.742,62.25 h1.2
  text "(Mixed)" at 111.539,62.25 h1.2
  text "(Mixed)" at 126.455,62.25 h1.2
  text "4" at 10.768,59.25 h1.2
  text "3,200mm (125,98mil)" at 21.565,59.25 h1.2
  text "PTH" at 44.958,59.25 h1.2
  text "Round" at 55.075,59.25 h1.2
  text "Top Layer - Bottom Layer" at 69.751,59.25 h1.2
  text "Pad" at 99.742,59.25 h1.2
  text "Rounded" at 111.539,59.25 h1.2
  text "c370h320" at 126.455,59.25 h1.2
  text "45 Total" at 10.768,56.25 h1.2

## Dimensions
3.15,3 to 16.7,6.475 on Dimensions
2.85,28 to 2.85,21.5 on Dimensions
79.35,3 to 79.35,25 on Dimensions
-0.3,21.5 to -0.3,6.5 on Dimensions
3.15,3 to 79.35,3 on Dimensions
0,28 to 82.5,28 on Dimensions
0,0 to 0,28 on Dimensions

## Text inside footprints (layer, text, board x,y; h text height)
CN4: Bottom Overlay "1" at 23.1,6.225 h1
CN5: Bottom Overlay "1" at 14.375,21.492 h1 r180
CN8: Bottom Overlay "1" at 40.5,6.225 h1
CN9: Bottom Overlay "1" at 31.225,21.5 h1 r180